# Altium PCB pcb_v1.PcbDoc
Units mil, origin at the board's own origin, x right, y up, seen from the top; angles counter-clockwise.
Board outline 3650 x 2300 mil, 2 copper layers (Top Layer, Bottom Layer); 25 components, 23 nets, 99 pads, 11 vias.
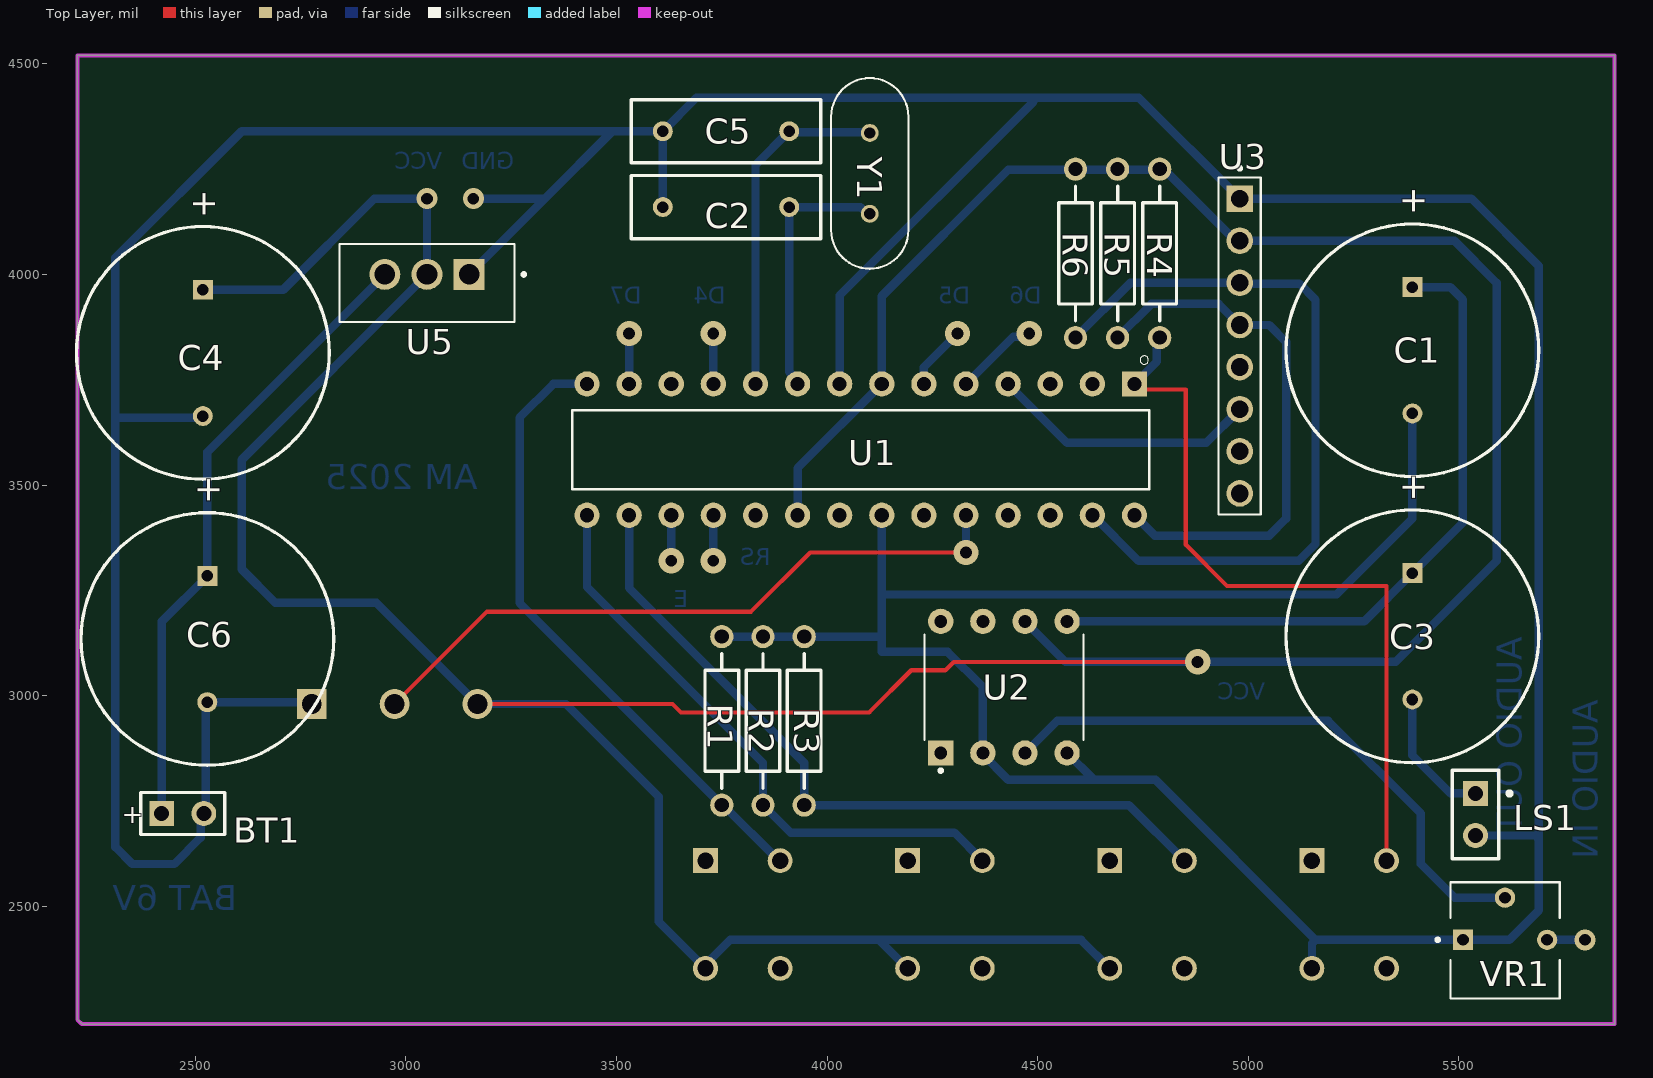
[diagram p0: Top Layer view]
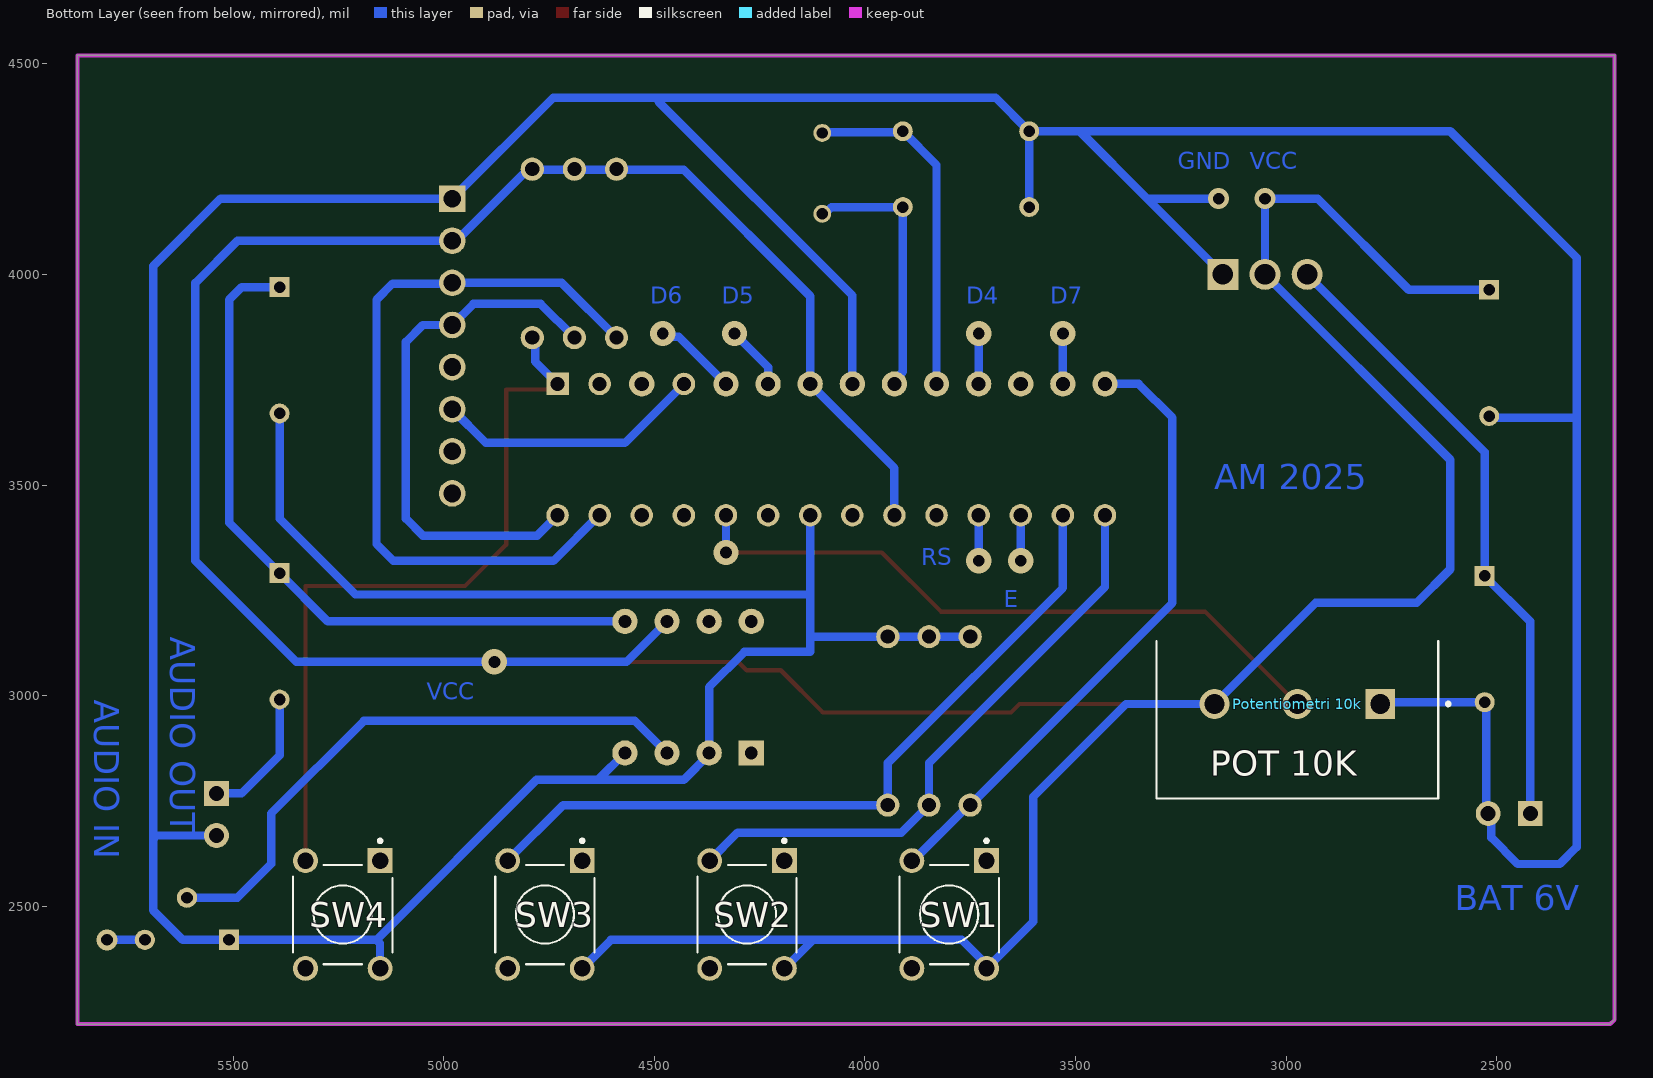
[diagram p1: Bottom Layer view, seen from below]
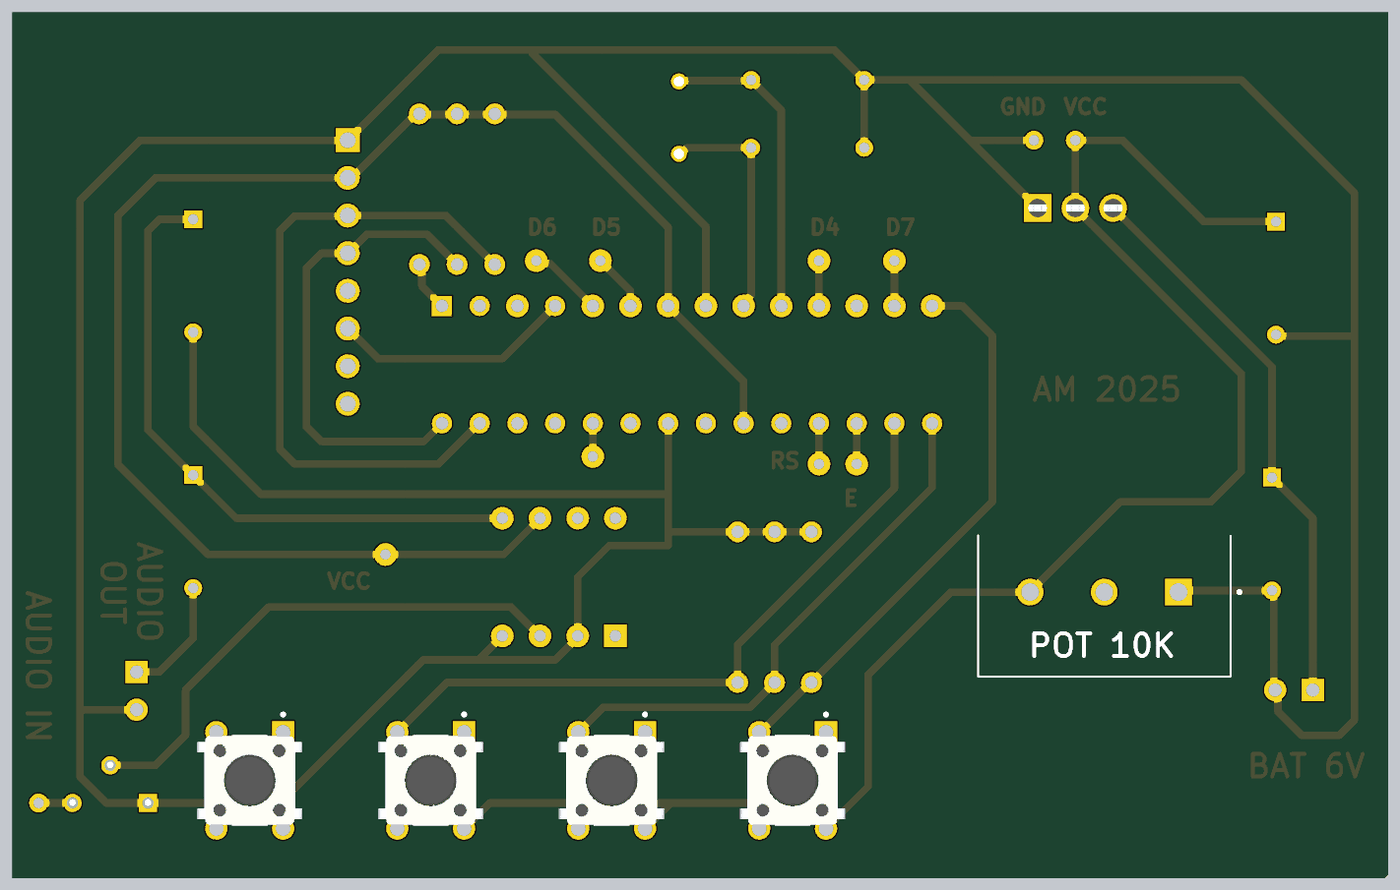
[diagram p2: 3D render of the assembled board from below, using the file's embedded part models]

## Layer stack, top to bottom
Top Solder: solder mask 0.4, Solder Resist, Dk 3.5
Top Layer: signal copper 1.4
Dielectric 1: dielectric 12.6, FR-4, Dk 4.8
Bottom Layer: signal copper 1.4
Bottom Solder: solder mask 0.4, Solder Resist, Dk 3.5

## Board outline
2230,2220 2220,2230 2220,4520 5870,4520 5870,2220

## Design rules (kind name [scope] priority, off if disabled: settings)
Clearance [All] p1: gap=20 ignorepadtopadclearanceinfootprint=FALSE
HoleSize [All] p1: absolutevalues=TRUE maxlimit=200 minlimit=1 maxpercent=80.000 minpercent=20.000
PolygonConnect [All] p1: connectstyle=Relief reliefconductorwidth=10 reliefentries=4 polygonreliefangle="90 Angle" airgapwidth=10
RoomDefinition Piirikaavio [InComponentClass('Piirikaavio')] p1: confinementstyle=ConfineIn formatcopy=TRUE lockcomponents=FALSE outline 2220,2220 5870,2220 5870,4520 2220,4520
RoutingVias [All] p1: holewidth=40 width=60 viastyle="Through Hole" minholewidth=40 minwidth=60 maxholewidth=40 maxwidth=60
SolderMaskExpansion [All] p1: expansion=4 istentingtop=FALSE
Width [All] p1: maxlimit=20 minlimit=10 preferedwidth=20 toplayer_maxwidth=10 toplayer_prefwidth=10 bottomlayer_minwidth=20 minimp=50.000000 maximp=50.000000 favimp=50.000000
29 further rules are at their usual default settings.

## Components (designator, comment, footprint, x,y, rotation, side; value= is the part's Value field where it differs from the comment)
BT1 "Battery 6V" BAT-2 2470,2720 r0 top
C1 "Cap Pol1" RB7.6-15 5390,3820 r90 top value=0.1µF
C2 "Cap" RAD-0.3 3760,4160 r0 top value=22pF
C3 "Cap Pol1" RB7.6-15 5390,3140.64 r90 top value=1000µF
C4 "Cap Pol1" RB7.6-15 2517.75,3813.7 r90 top value=10µF
C5 "Cap" RAD-0.3 3760,4340 r0 top value=22pF
C6 "Cap Pol1" RB7.6-15 2528.37,3134.34 r90 top value=10µF
LS1 "Kaiutin" PIN2 5540,2767.63 r270 top
"Potentiometri 10k" "PTN16-A20120K1B1" POT_PTN16-A20120K1B1 2776.3,2980 r0 bottom
R1 "Res2" AXIAL-0.4 3750,2940 r90 top value=10k
R2 "Res2" AXIAL-0.4 3847.88,2940 r90 top value=10k
R3 "Res2" AXIAL-0.4 3945.77,2940 r90 top value=10k
R4 "Res2" AXIAL-0.4 4790,4050 r90 top value=10k
R5 "Res2" AXIAL-0.4 4690,4050 r270 top value=10k
R6 "Res2" AXIAL-0.4 4590,4050 r270 top value=10k
SW1 "1825910-6" SW_1825910-6-4 3800,2480 r270 bottom
SW2 "1825910-6" SW_1825910-6-4 4280,2480 r270 bottom
SW3 "1825910-6" SW_1825910-6-4 4760,2480 r270 bottom
SW4 "1825910-6" SW_1825910-6-4 5240,2480 r270 bottom
U1 "ATMEGA328P-PU" DIP794W46P254L2967H457Q28B 4080,3584.09 r270 top
U2 "LM386N-4/NOPB" DIP794W45P254L959H508Q8 4420,3020 r90 top
U3 "SI4703 Kehitysalusta" HARWIN_M20-9730846 4980,3830 r270 top
U5 "LM1117T-3.3/NOPB" TO254P1054X470X1955-3 3050,4000 r180 top
VR1 "3362P-1-252LF" TRIM_3362P-1-252LF 5610,2420 r0 top
Y1 "HC-49/U-S16000000ABJB" XTAL_HC49P488W43L1150T466H350 4101.51,4240 r90 top

## Footprints (in the part's own frame and the unit in brackets; to place one, negate y for a bottom-side part, rotate by r counter-clockwise, add the part's x,y. Pads: shape width x height; smd on the part's side, far side on the other; paste and mask are expansions set on the pad)
AXIAL-0.4 [mm] "Axial Device, Thru-Hole; 2 Leads; 0.4 in Pin Spacing"
  round 1.4 hole 0.85: 1(-5.08,0) 2(5.08,0)
  silkscreen extent -4.06,-1.02 4.06,1.02
BAT-2 [mm] "Battery; 2 Leads"
  rect 1.5x1.5 hole 0.9: 1(-1.27,0)
  round 1.5 hole 0.9: 2(1.27,0)
  silkscreen extent -2.54,-1.27 2.54,1.27
DIP794W45P254L959H508Q8 [mil]
  rect 60x60 hole 30.71: 1(-156.3,150)
  round 60 hole 30.71: 2(-156.3,50) 3(-156.3,-50) 4(-156.3,-150) 5(156.3,-150) 6(156.3,-50) 7(156.3,50) 8(156.3,150)
  silkscreen extent -202,-189 125,189
DIP794W46P254L2967H457Q28B [mil]
  rect 60x60 / inner rect 53.46x53.46 / far side rect 53.46x53.46 hole 33.46: 1(-155.91,650)
  round 60 / inner round 53.46 / far side round 53.46 hole 33.46: 2(-155.91,550) 4(-155.91,350) 15(155.91,-650) 16(155.91,-550) 17(155.91,-450) 18(155.91,-350) 19(155.91,-250) 20(155.91,-150) 21(155.91,-50) 22(155.91,50) 23(155.91,150) 24(155.91,250) 25(155.91,350) 26(155.91,450) 27(155.91,550) 28(155.91,650)
  round 60 hole 33.46: 3(-155.91,450) 5(-155.91,250) 6(-155.91,150) 7(-155.91,50) 8(-155.91,-50) 9(-155.91,-150) 10(-155.91,-250) 11(-155.91,-350) 12(-155.91,-450) 13(-155.91,-550) 14(-155.91,-650)
  silkscreen extent -223,-685 94,685
HARWIN_M20-9730846 [mm]
  rect 1.605x1.605 / inner round 1.605 / far side rect 1.605x1.605 hole 1.07: 1(-8.89,0)
  round 1.605 hole 1.07: 2(-6.35,0) 3(-3.81,0) 4(-1.27,0) 5(1.27,0) 6(3.81,0) 7(6.35,0) 8(8.89,0)
  silkscreen extent -10.82,-1.27 10.16,1.27
PIN2 [mm] "Photosensitive Diode; 2 Leads"
  rect 1.5x1.5 hole 0.9: 1(0,0)
  round 1.5 hole 0.9: 2(2.54,0)
  silkscreen extent -1.4,-1.4 3.94,2.18
POT_PTN16-A20120K1B1 [mm]
  rect 1.8x1.8 / inner round 1.8 / far side rect 1.8x1.8 hole 1.2: 1(0,0)
  round 1.8 hole 1.2: 2(5,0) 3(10,0)
  silkscreen extent -4.2,-3.81 13.5,5.69
RAD-0.3 [mm] "Radial Cap, Thru-Hole; 2 Leads; 0.3 in Pin Spacing"
  round 1.2 hole 0.7: 1(-3.81,0) 2(3.81,0)
  silkscreen extent -5.71,-1.91 5.71,1.91
RB7.6-15 [mm] "Polarized Capacitor (Radial); 2 Leads"
  rect 1.2x1.2 hole 0.7: 1(3.81,0)
  round 1.2 hole 0.7: 2(-3.81,0)
  silkscreen extent -7.62,-7.62 7.62,7.62
SW_1825910-6-4 [mm]
  rect 1.498x1.498 / inner round 1.498 / far side rect 1.498x1.498 hole 0.99: 1(-3.25,2.25)
  round 1.498 hole 0.99: 2(3.25,2.25) 3(-3.25,-2.25) 4(3.25,-2.25)
  silkscreen extent -4.54,-3 3,3, body extent -3,-3.9 3,3.9, height 5.01
TO254P1054X470X1955-3 [mm]
  rect 1.86x1.86 / inner round 1.86 / far side rect 1.86x1.86 hole 1.24: 1(-2.54,0)
  round 1.86 hole 1.24: 2(0,0) 3(2.54,0)
  silkscreen extent -5.94,-1.84 5.27,2.86, body extent -5.08,-1.49 5.08,2.71, height 22.86
TRIM_3362P-1-252LF [mil]
  rect 48.11x48.11 hole 28.11: 1(-100,0)
  round 48.11 hole 28.11: 2(0,100) 3(100,0)
  silkscreen extent -164,-139 130,137, body extent -130,-138 130,138, height 192
XTAL_HC49P488W43L1150T466H350 [mm]
  round 1.08 hole 0.68: 1(-2.44,0) 2(2.44,0)
  silkscreen extent -5.75,-2.33 5.75,2.33, body extent -5.75,-2.33 5.75,2.33, height 3.5

## Part data
BT1: library part Battery, "Multicell Battery", LatestRevisionDate=17-Jul-2002, LatestRevisionNote="Re-released for DXP Platform.", PackageDescription="Battery; 2 Leads", PackageReference=BAT-2, Published=24-Mar-1999, Publisher="Altium Limited"
C1 C3 C4 C6: "Polarized Capacitor (Radial)", LatestRevisionDate=17-Jul-2002, LatestRevisionNote="Re-released for DXP Platform.", PackageDescription="Polarized Capacitor (Radial); 2 Leads", PackageReference=RB7.6-15, Published=8-Jun-2000, Publisher="Altium Limited"
C2 C5: "Capacitor", LatestRevisionDate=17-Jul-2002, LatestRevisionNote="Re-released for DXP Platform.", PackageDescription="Radial Cap, Thru-Hole; 2 Leads; 0.3 in Pin Spacing", PackageReference=RAD-0.3, Published=8-Jun-2000, Publisher="Altium Limited"
LS1: library part Speaker, "Loudspeaker", LatestRevisionDate=17-Jul-2002, LatestRevisionNote="Re-released for DXP Platform.", PackageReference=PIN2, Published=24-Mar-1999, Publisher="Altium Limited"
"Potentiometri 10k": "16.5 mm, Horizontal, Linear, 20 kÎ©, Through Hole, Knurled Shaft Single Section Rotary Potentiometer", Package=None, Check_prices=https://www.snapeda.com/parts/PTN16-A20120K1B1/CUI+Devices/view-part/?ref=eda, CUI_purchase_URL=https://www.cuidevices.com/product/motion-and-control/potentiometers/rotary-potentiometers/ptn16-a20120k1b1?utm_source=snapeda.com&utm_medium=referral&utm_campaign=snapedaBOM, MF="CUI Devices", MP=PTN16-A20120K1B1, SnapEDA_Link=https://www.snapeda.com/parts/PTN16-A20120K1B1/CUI+Devices/view-part/?ref=snap
R1 R2 R3 R4 R5 R6: "Resistor 10k", LatestRevisionDate=17-Jul-2002, LatestRevisionNote="Re-released for DXP Platform.", PackageDescription="Axial Device, Thru-Hole; 2 Leads; 0.4 in Pin Spacing", PackageReference=AXIAL-0.4, Published=8-Jun-2000, Publisher="Altium Limited"
SW1 SW2 SW3 SW4: "Switch Push Button OFF (ON) SPST Round Button 0.05A 24VDC Momentary Contact PC Pins Thru-Hole", Package=None, Check_prices=https://www.snapeda.com/parts/1825910-6/TE+Connectivity+ALCOSWITCH+Switches/view-part/?ref=eda, Digi-Key_Part_Number=450-1650-ND, MF="TE Connectivity", MP=1825910-6, Purchase-URL=https://pricing.snapeda.com/search/part/1825910-6/?ref=eda, SnapEDA_Link=https://www.snapeda.com/parts/1825910-6/TE+Connectivity+ALCOSWITCH+Switches/view-part/?ref=snap
U1: "ATmega Series 20 MHz 32 KB Flash 2 KB SRAM 8-Bit Microcontroller - DIP-28", Package=None, Availability=Unavailable, MP=ATMEGA328P-PU, Price=None
U2: "LM386 Low Voltage Audio Power Amplifier", Package=None, Availability=Unavailable, MP=LM386N-4/NOPB, Price=None
U3: library part M20-9730846, "Si4703 Evaluation board", Package=None, Availability=Unavailable, MF=Harwin, MP=M20-9730846, Price=None
U5: "800-mA 15-V linear voltage regulator", Package="TO-220-3 Texas Instruments", Availability="In Stock", Check_prices=https://www.snapeda.com/parts/LM1117T-3.3/NOPB/Texas+Instruments/view-part/?ref=eda, MF="Texas Instruments", MP=LM1117T-3.3/NOPB, Price=None, Purchase-URL=https://pricing.snapeda.com/search/part/LM1117T-3.3/NOPB/?ref=eda, SnapEDA_Link=https://www.snapeda.com/parts/LM1117T-3.3/NOPB/Texas+Instruments/view-part/?ref=snap
VR1: "10 kOhms Pins Through Hole Trimmer Potentiometer Cermet 1 Turn Top Adjustment", Package="3362P-1 Bourns Inc.", Availability=Warning, Check_prices=https://www.snapeda.com/parts/3362P-1-252LF/Bourns/view-part/1439689/?ref=eda, MF=Bourns, MP=3362P-1-252LF, Price=None, Purchase-URL=https://pricing.snapeda.com/search/part/3362P-1-252LF/?ref=eda, SnapEDA_Link=https://www.snapeda.com/parts/3362P-1-252LF/Bourns/view-part/1439689/?ref=snap
Y1: "8 MHz Crystal  / HC-49/US", Package="HC-49/US Citizen Finetech Miyota", Check_prices=https://www.snapeda.com/parts/HC-49/U-S16000000ABJB/Citizen/view-part/?ref=eda, MF="Citizen Finedevice", MP=HC-49/U-S16000000ABJB, SnapEDA_Link=https://www.snapeda.com/parts/HC-49/U-S16000000ABJB/Citizen/view-part/?ref=snap

## Via types
v1: diameter 60, hole 28, Top Layer to Bottom Layer, 8 vias
v2: diameter 50, hole 28, Top Layer to Bottom Layer, 3 vias

## Nets (pads, with @x,y where several pads share a name; then routed paths per layer and width w, separated by ;. In a path a pad name is that pad's centre, name@x,y a point inside that pad or via, vN(x,y) a via of type N, cw(c..) or ccw(c..) an arc to the next point about the centre after c; other vN are vias at no path point)
A1: "Potentiometri 10k.2" U1.24 | length 1594.2
  Top Layer w10: 2973.15,2980 3192.36,3199.21 3819.21,3199.21 3960,3340 v1(4330,3340)
  Bottom Layer w20: v1(4330,3340) U1.24
AUDIO: VR1.3 | length 90
  Bottom Layer w20: VR1.3 v2(5800,2420)
BTN1: R1.1 SW1.3 U1.14 | length 1505.2
  Bottom Layer w20: U1.14 3350,3740 3270,3660 3270,3220 R1.1 3753.27,2740 3885.32,2607.95 SW1.3
BTN2: R2.1 SW2.3 U1.15 | length 1436.7
  Bottom Layer w20: U1.15 3430,3257.88 3847.88,2840 R2.1 3913.54,2674.35 4302.19,2674.35 SW2.3
BTN3: R3.1 SW3.3 U1.16 | length 1817.9
  Bottom Layer w20: U1.16 3530,3255.77 3945.77,2840 R3.1 4716.54,2740 SW3.3
BTN4: R4.1 SW4.3 U1.1 | length 1800
  Top Layer w10: U1.1 4743.41,3726.59 4851.67,3726.59 4851.67,3358.33 4950,3260 5328.58,3260 SW4.3
  Bottom Layer w20: U1.1 4783.28,3793.28 4783.28,3843.28 R4.1
D4: U1.11 | length 120
  Bottom Layer w20: U1.11 v1(3730,3860)
D5: U1.6 | length 153.1
  Bottom Layer w20: U1.6 4230,3780 v1(4310,3860)
D6: U1.5 | length 209.7
  Bottom Layer w20: U1.5 4442.35,3852.35 4472.35,3852.35 v1(4480,3860) v1@4480,3870
D7: U1.13 | length 120
  Bottom Layer w20: U1.13 v1(3530,3860)
E: U1.17 | length 108.2
  Bottom Layer w20: v1(3630,3320) U1.17
GND: "Potentiometri 10k.1" BT1.2 C1.2 C2.1 C4.2 C5.1 C6.2 LS1.2 R1.2 R2.2 R3.2 SW4.2 U1.8 U1.22 U2.2 U2.4 U3.1 U5.1 VR1.1 | length 13936.6
  Bottom Layer w20: C4.2 2514.04,3660 2310,3660 ; 2776.3,2980 2771.96,2984.34 C6.2 2524.18,2980.16 2524.18,2724.18 BT1.2 2512.53,2712.53 2512.53,2662.53 2450,2600 2350,2600 2310,2640 2310,3660 ; U5.1 3330,4180 ; v2(3160,4180) 3330,4180 ; C2.1 C5.1 ; R1.2 R2.2 R3.2 4130,3140 ; U1.8 4030,3950 4490,4410 4490,4420 ; U1.22 4130,3240 ; U2.4 4633.7,2800 ; SW4.2 5151.54,2352.17 5151.54,2411.54 5160,2420 ; C1.2 5390,3420 5210,3240 4130,3240 ; LS1.2 5682.37,2667.63 5690,2660 ; 2310,3660 2310,4040 2610,4340 3490,4340 ; 3330,4180 3490,4340 ; 3490,4340 C5.1 ; C5.1 3690,4420 4490,4420 ; 4130,3140 4130,3240 ; 4130,3140 4130,3103.7 4286.3,3103.7 4370,3020 U2.2 4370,2860 4430,2800 4633.7,2800 ; 4490,4420 4740,4420 U3.1 5530,4180 5690,4020 5690,2660 ; 4633.7,2800 4780,2800 5160,2420 ; 5160,2420 VR1.1 5620,2420 5690,2490 5690,2660
NetBT1_1: BT1.1 C6.1 U5.3 | length 1499.5
  Bottom Layer w20: BT1.1 2420,3175.97 C6.1 2528.37,3578.37 U5.3
NetC1_1: C1.1 C3.1 U2.5 | length 1698.9
  Bottom Layer w20: U2.5 5275.66,3176.3 C3.1 5510,3410.64 5510,3940 5480,3970 C1.1
NetC2_2: C2.2 U1.9 Y1.1 | length 634.2
  Bottom Layer w20: U1.9@3935.51,3745.51 U1.9 3930,3749.06 3910,3769.06 C2.2 4079.35,4160 4095.41,4143.94 Y1.1
NetC3_2: C3.2 LS1.1 | length 320
  Bottom Layer w20: C3.2 5390,2858.11 5480.47,2767.63 LS1.1
NetC5_2: C5.2 U1.10 Y1.2 | length 834.1
  Bottom Layer w20: U1.10@3824.49,3745.51 U1.10 3830,4260 C5.2 3911.97,4338.03 4099.54,4338.03 Y1.2
NetU2_3: U2.3 VR1.2 | length 1415.9
  Bottom Layer w20: U2.3 4546.3,2940 5190,2940 5410,2720 5410,2600 5490,2520 VR1.2
RS: U1.18 | length 108.2
  Bottom Layer w20: v1(3730,3320) U1.18
RST: U1.4 U3.6 | length 641.1
  Bottom Layer w20: U1.4 4570,3600 4900,3600 U3.6
SCL: R5.2 U1.28 U3.4 | length 1286.9
  Bottom Layer w20: R5.2 4770,3930 4930,3930 U3.4 5050,3880 5090,3840 5090,3420 5050,3380 4778.19,3380 U1.28
SDA: R6.2 U1.27 U3.3 | length 1811.8
  Bottom Layer w20: R6.2 4720,3980 U3.3 4981.59,3978.41 5121.59,3978.41 5160,3940 5160,3360 5120,3320 4740,3320 4631.81,3428.19 U1.27
VCC: "Potentiometri 10k.3" C4.1 R4.2 R5.1 R6.1 SW1.2 SW2.2 SW3.2 U1.7 U1.20 U2.6 U3.2 U5.2 | length 10456.8
  Top Layer w10: 3170,2980 3633.24,2980 3653.24,2960 4100,2960 4200,3060 4280.84,3060 4300.84,3080 v1(4880,3080)
  Bottom Layer w20: C4.1 2708.72,3963.7 2925.02,4180 v2(3050,4180) U5.2 2610,3560 2610,3300 2690,3220 2930,3220 3170,2980 3380,2980 3600,2760 3600,2463.46 SW1.2 3711.42,2361.42 3770,2420 4123.46,2420 ; U1.20 3930,3540 U1.7 4130,3948.26 4430,4248.26 4688.26,4248.26 R5.1 ; SW2.2 4123.46,2420 ; U2.6 4566.3,3080 v1(4880,3080) 5350,3080 5590,3320 5590,3980 5490,4080 U3.2 4969.5,4080 4799.5,4250 R4.2 ; SW3.2 4603.46,2420 4123.46,2420 ; R5.1@4690,4248.26 R4.2@4790,4248.26
pads on no net: SW1.1 SW1.4 SW2.1 SW2.4 SW3.1 SW3.4 SW4.1 SW4.4 U1.2 U1.3 U1.12 U1.19 U1.21 U1.23 U1.25 U1.26 U2.1 U2.7 U2.8 U3.5 U3.7 U3.8

## Keep-outs
Keep-Out Layer:
  the board outline again, w10

## Other copper
Bottom Layer:
  text "VCC" at 3086.63,4250 h40
  text "GND" at 3256.63,4250 h40
  text "D7" at 3560,3930 h40
  text "D4" at 3760,3930 h40
  text "D5" at 4340,3930 h40
  text "D6" at 4510,3930 h40
  text "AM 2025" at 3170,3490 h60
  text "RS" at 3866.65,3310 h40
  text "E" at 3670,3210 h40
  text "AUDIO OUT" at 5650,3140 h60 r90
  text "VCC" at 5040,2990 h40
  text "AUDIO IN" at 5830,2990 h60 r90
  text "BAT 6V" at 2600,2490 h60

## Silkscreen, mask and mechanical layers (free items; w line width, h text height)
Bottom Overlay:
  text "POT 10K" at 3179.87,2810 h60

## Text inside footprints (layer, text, board x,y; h text height)
BT1: Top Overlay "+" at 2325.51,2697.28 h45.28
C1: Top Overlay "+" at 5419.01,4140.15 h59.06 r90
C3: Top Overlay "+" at 5419.01,3460.79 h59.06 r90
C4: Top Overlay "+" at 2546.75,4133.86 h59.06 r90
C6: Top Overlay "+" at 2557.37,3454.49 h59.06 r90